# Altium PCB AIL_pcb.PcbDoc
Units mm, origin at the board's own origin, x right, y up, seen from the top; angles counter-clockwise.
Board outline 65 x 35 mm, 2 copper layers (Top Layer, Bottom Layer); 14 components, 9 nets, 36 pads, 2 vias.
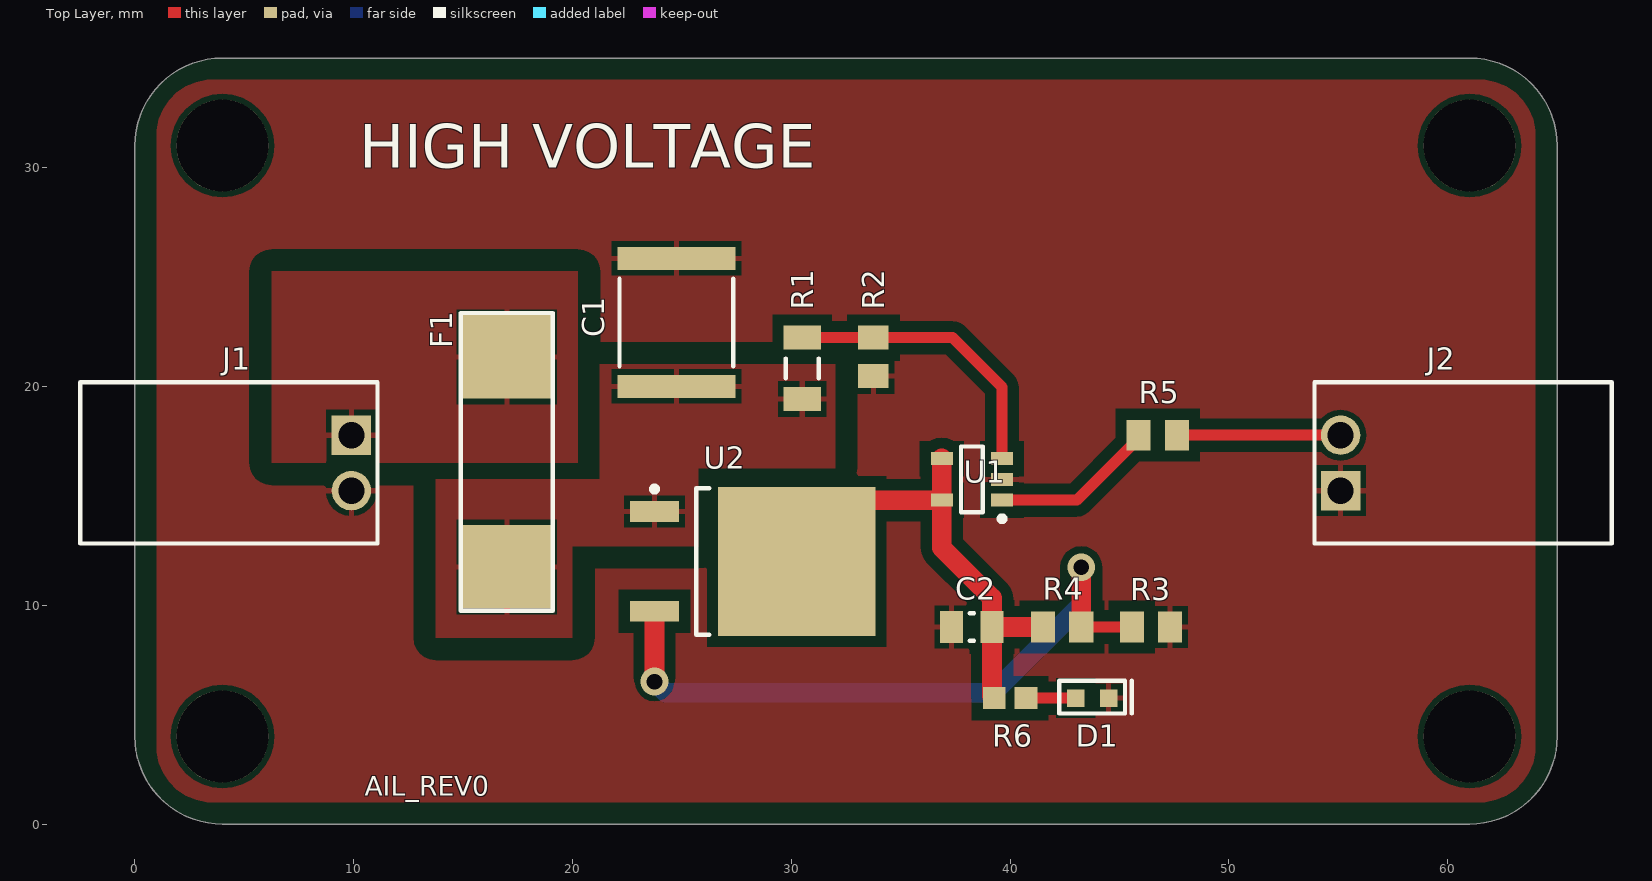
[diagram p0: Top Layer view]
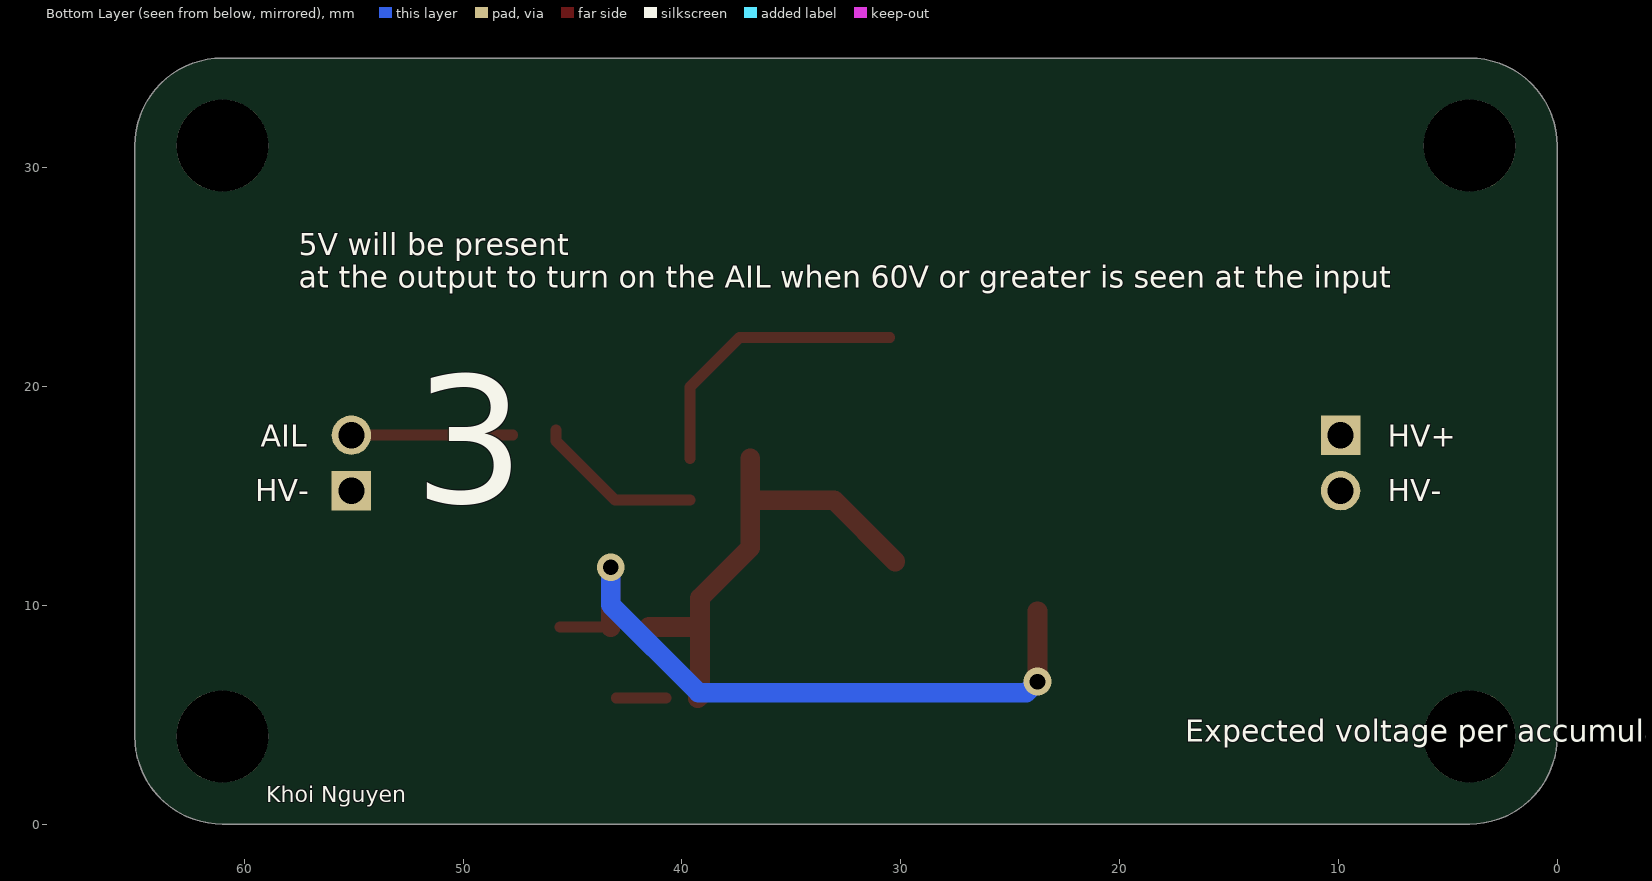
[diagram p1: Bottom Layer view, seen from below]
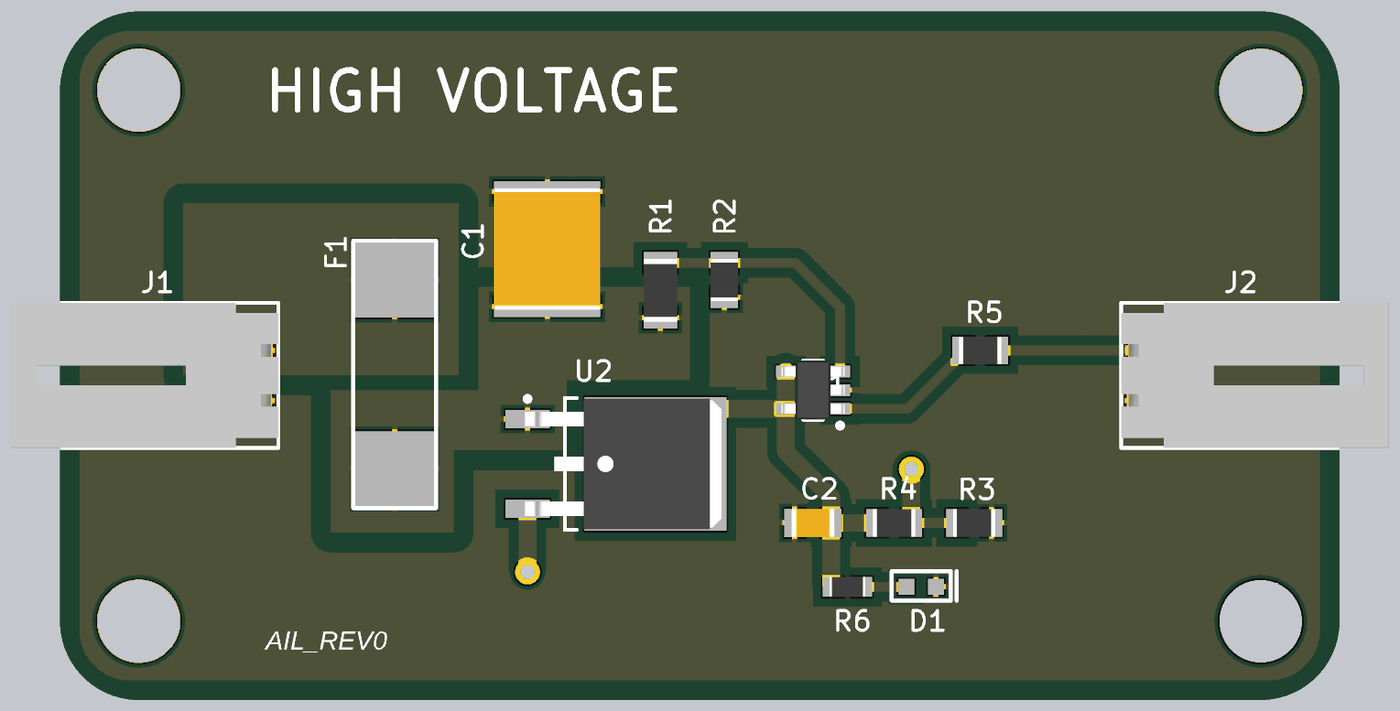
[diagram p2: 3D render of the assembled board from above, using the file's embedded part models]

## Layer stack, top to bottom
Top Solder: solder mask 0.0102, Solder Resist, Dk 3.5
Top Layer: signal copper 0.0356
Dielectric 1: dielectric 0.32, FR-4, Dk 4.8
Bottom Layer: signal copper 0.0356
Bottom Solder: solder mask 0.0102, Solder Resist, Dk 3.5

## Board outline
0,4 0,31 cw(c4,31) 4,35 61,35 cw(c61,31) 65,31 65,4 cw(c61,4) 61,0 4,0 cw(c4,4)

## Design rules (kind name [scope] priority, off if disabled: settings)
Clearance Clearance_3 [InNamedPolygon('Top Layer-HV_GND')] p1: gap=0.254 ignorepadtopadclearanceinfootprint=FALSE except(0: Arc-Hole Track-Hole SMDPad-Hole THPad-Hole Via-Hole Fill-Hole Poly-Hole Region-Hole Text-Hole; 0.5: Track-Poly SMDPad-Poly; 1: Poly-Poly)
Clearance [All] p2: gap=0.254 ignorepadtopadclearanceinfootprint=FALSE except(0: Arc-Hole Track-Hole SMDPad-Hole THPad-Hole Via-Hole Fill-Hole Poly-Hole Region-Hole Text-Hole)
PlaneClearance [InNet('HV_GND')] p1: clearance=5
PolygonConnect [All] p1: connectstyle=Relief reliefconductorwidth=0.254 reliefentries=4 polygonreliefangle="90 Angle" airgapwidth=0.254
RoutingVias [All] p1: holewidth=0.711 width=1.27 viastyle="Through Hole" minholewidth=0.711 minwidth=1.27 maxholewidth=0.711 maxwidth=1.27
SolderMaskExpansion [All] p1: expansion=0.102
Width [All] p1: maxlimit=1 minlimit=0.1 preferedwidth=0.25 minimp=50.000000 maximp=50.000000 favimp=50.000000
29 further rules are at their usual default settings.

## Components (designator, comment, footprint, x,y, rotation, side; value= is the part's Value field where it differs from the comment)
C1 "2.2 uF" CAPC5850X25N 24.75,22.925 r270 top
C2 "1 uF" CAPC2012X14N 38.25,9 r0 top
D1 "Green" LED_0603 43.75,5.75 r0 top
F1 "250V 800mA" FUSE_SMD 17,18.75 r270 top
J1 "HV" 2_PIN_CONNECTOR -2.5,16.5 r270 top
J2 "AIL" 2_PIN_CONNECTOR 67.5,16.5 r90 top
R1 "110k Ohm" RESC3116X06N 30.5,20.825 r270 top
R2 "10k Ohm" RESC2012X06N 33.75,21.35 r270 top
R3 "18.2k Ohm" RESC2012X06N 46.439,9 r180 top
R4 "6.04k Ohm" RESC2012X06N 42.375,9 r180 top
R5 "560 Ohm" RESC2012X06N 46.75,17.77 r180 top
R6 "300 Ohm" RESC1608X06N 40,5.75 r180 top
U1 "MCP6001T-I/OT" SOT95P280X145-5N 38.254,15.75 r180 top
U2 "LDO" DPAK228P998X235-3N 28.25,12 r0 top

## Footprints (in the part's own frame and the unit in brackets; to place one, negate y for a bottom-side part, rotate by r counter-clockwise, add the part's x,y. Pads: shape width x height; smd on the part's side, far side on the other; paste and mask are expansions set on the pad)
2_PIN_CONNECTOR [mm]
  rect 1.8x1.8 hole 1.2: 1(-1.27,12.4)
  round 1.8 hole 1.2: 2(1.27,12.4)
  silkscreen extent -3.68,0 3.68,13.59, body extent -3.68,0 3.68,13.59, height 8.06
CAPC2012X14N [mm] "Chip Capacitor, 2-Leads, Body 2.00x1.25mm, IPC Medium Density"
  rect 1.05x1.45 smd: 1(-0.925,0) 2(0.925,0)
  silkscreen extent -0.1,-0.62 0.1,0.62, body extent -1.1,-0.72 1.1,0.72, height 1.4
CAPC5850X25N [mm] "Chip Capacitor, 2-Leads, Body 5.75x5.00mm, IPC Medium Density"
  rect 1.05x5.4 smd: 1(-2.925,0) 2(2.925,0)
  silkscreen extent -2,-2.6 2,2.6, body extent -3.1,-2.7 3.1,2.7, height 2.5
DPAK228P998X235-3N [mm] "D-PAK, 3-Pads, Body 6.31x6.69mm (max), IPC Medium Density"
  rect 2.25x0.95 smd: 1(-4.5,2.28) 3(-4.5,-2.28)
  rect 7.2x6.8 smd: 4(2,0)
  silkscreen extent -4.62,-3.35 -2,3.43, body extent -4.62,-3.32 5.36,3.32, height 2.45
FUSE_SMD [mm]
  rect 3.81x4.06 smd: 1(-2.6,0) 2(7,0)
  silkscreen extent -4.6,-2.1 9,2.1
LED_0603 [mm]
  rect 0.8x0.8 smd: 1(-0.75,0) 2(0.75,0)
  silkscreen extent -1.5,-0.7 1.8,0.8
RESC1608X06N [mm] "Chip Resistor, 2-Leads, Body 1.60x0.80mm, IPC Medium Density"
  rect 1.05x1 smd: 1(-0.725,0) 2(0.725,0)
  body extent -0.9,-0.5 0.9,0.5, height 0.55
RESC2012X06N [mm] "Chip Resistor, 2-Leads, Body 2.00x1.25mm, IPC Medium Density"
  rect 1.1x1.4 smd: 1(-0.875,0) 2(0.875,0)
  body extent -1.07,-0.7 1.07,0.7, height 0.6
RESC3116X06N [mm] "Chip Resistor, 2-Leads, Body 3.10x1.60mm, IPC Medium Density"
  rect 1.1x1.7 smd: 1(-1.4,0) 2(1.4,0)
  silkscreen extent -0.45,-0.75 0.45,0.75, body extent -1.6,-0.85 1.6,0.85, height 0.65
SOT95P280X145-5N [mm] "SOT23, 5-Leads, Body 2.90x2.80mm, Pitch 0.95mm, IPC Medium Density"
  rect 1x0.6 smd: 1(-1.375,0.95) 2(-1.375,0) 3(-1.375,-0.95) 4(1.375,-0.95) 5(1.375,0.95)
  silkscreen extent -1.5,-1.5 0.5,1.92, body extent -1.6,-1.5 1.6,1.5, height 1.45

## Part data
C1: library part CGA9P3X7T2E225K250KE, "CAP CER 2.2UF 250V X7T 2220", Capacitance=2.2uF, Case/Package=2220, Case Code (Metric)=5750, Dielectric=X7T, Manufacturer=TDK, Max Operating Temperature=125°C, Min Operating Temperature=-55°C, Package Quantity=1, Ratings=AEC-Q200, Supplier Part Number 1=445-8766-1-ND, Tolerance=10%, Voltage Rating=250V, Case Code (Imperial)=2220, ComponentLink1Description=http://www.mouser.com/ds/2/400/lcc_commercial_soft_en-775842.pdf?src-supplier=Mouser, ComponentLink1URL=http://www.mouser.com/ds/2/400/lcc_commercial_soft_en-775842.pdf?src-supplier=Mouser, ComponentLink2Description=http://www.farnell.com/datasheets/1839935.pdf?src-supplier=Element14, ComponentLink2URL=http://www.farnell.com/datasheets/1839935.pdf?src-supplier=Element14, Depth=5mm, Features="Soft Termination", Height=2.5mm, Lead Free="Lead Free", Length=5.7mm, Manufacturer Part Number=CGA9P3X7T2E225K250KE, Mount="Surface Mount", Packaging="Tape and Reel", Pricing 1="1=4.7, 10=4.227, 100=3.1935 (USD)", REACH SVHC="No SVHC", Stock 1=26264, Supplier 1=Digi-Key, Termination=SMD/SMT, Thickness=0.11inch, Voltage Rating (DC)=250V, Weight=0.016932oz, Width=5mm
C2: library part CL10A105KP8NNNC, "Cap Ceramic 1uF 10V X5R 10% SMD 0603 85C Paper T/R", Capacitance=1uF, Case/Package=0603, Case Code (Metric)=1608, Dielectric=X5R, Manufacturer=Samsung, Max Operating Temperature=85°C, Min Operating Temperature=-55°C, Package Quantity=1, Supplier Part Number 1=1276-1182-1-ND, Tolerance=10%, Voltage=10V, Case Code (Imperial)=0603, ComponentLink1Description=https://www.verical.com/server-webapp/html/getDatasheet?partID=358616&src-supplier=Verical, ComponentLink1URL=https://www.verical.com/server-webapp/html/getDatasheet?partID=358616&src-supplier=Verical, ComponentLink2Description=http://www1.futureelectronics.com/doc/SAMSUNG%20PASSIVE/CL05B104KQ5NNNC.pdf?src-supplier=Future+Electronics, ComponentLink2URL=http://www1.futureelectronics.com/doc/SAMSUNG%20PASSIVE/CL05B104KQ5NNNC.pdf?src-supplier=Future+Electronics, Contact Plating=Tin, Depth=0.8mm, Height=0.8mm, Length=1.6mm, Manufacturer Part Number=CL10A105KP8NNNC, Mount="Surface Mount", Packaging="Tape and Reel", Pricing 1="1=0.1, 10=0.036, 100=0.0161, 500=0.01152, 1000=0.00905 (USD)", Radiation Hardening=No, Stock 1=3646234, Supplier 1=Digi-Key, Thickness=0.035inch, Voltage Rating=10V, Width=0.031inch
D1: library part LTST-C191KGKT, "LED Uni-Color Green 574nm 2-Pin Chip LED T/R", Case/Package=0603, Case Code (Metric)=1608, Forward Current=30mA, Forward Voltage=2V, Lens Color=Colorless, Manufacturer="Vishay Lite-On", Max Operating Temperature=85°C, Max Power Dissipation=75mW, Min Operating Temperature=-55°C, Package Quantity=1, Reverse Voltage=5V, Supplier Part Number 1=160-1446-1-ND, Test Current=20mA, Case Code (Imperial)=0603, Color=Green, ComponentLink1Description=http://optoelectronics.liteon.com/upload/download/DS22-2000-228/LTST-C191KGKT.PDF?src-supplier=Digi-Key, ComponentLink1URL=http://optoelectronics.liteon.com/upload/download/DS22-2000-228/LTST-C191KGKT.PDF?src-supplier=Digi-Key, Depth=0.8mm, Dominant Wavelength=571nm, Height=0.55mm, Illumination Color=Green, Lead Free="Lead Free", Length=1.6mm, Lens Style=Rectangular,Colorless, Lens Transparency=Clear, Luminous Intensity=35mcd, Manufacturer Part Number=LTST-C191KGKT, Mount="Surface Mount", Number of Elements=1, Number of LEDs=1, Number of Pins=2, Packaging="Tape and Reel", Power Dissipation=75mW, Power Rating=75mW, Pricing 1="1=0.28, 10=0.201, 100=0.0954, 500=0.06364, 1000=0.04984, 2500=0.04878 (USD)", Radiation Hardening=No, Stock 1=840932, Supplier 1=Digi-Key, Viewing Angle=130°, Wavelength=574nm, Width=0.8mm
F1: library part 0678D0800-02, Case/Package=SMD/SMT, Current Rating=800mA, DC Cold Resistance=380mR, Manufacturer=Bel, Max Operating Temperature=125°C, Min Operating Temperature=-55°C, Supplier Part Number 1=507-2258-6-ND, Voltage Rating (AC)=350V, Voltage Rating (DC)=250V, Approvals=cURus, Fuse Type="Board Mount (Cartridge Style Excluded)", Manufacturer Part Number=0678D0800-02, Mount="Surface Mount", Packaging="Tape and Reel", Pricing 1="1=1.2, 5=1.164, 10=1.089, 50=0.901, 100=0.7508, 250=0.732, 500=0.61936, 1000=0.54429 (USD)", Stock 1=2000, Supplier 1=Digi-Key
J1 J2: library part 0705530001, Color=Black, Contact Resistance=30mR, Manufacturer=Molex, Max Operating Temperature=105°C, Min Operating Temperature=-40°C, Supplier Part Number 1=WM4900-ND, ComponentLink1Description=https://www.molex.com/pdm_docs/ps/PS-70400.pdf?src-supplier=Digi-Key, ComponentLink1URL=https://www.molex.com/pdm_docs/ps/PS-70400.pdf?src-supplier=Digi-Key, ComponentLink2Description=http://www.molex.com/webdocs/datasheets/pdf/en-us/0705530001_PCB_HEADERS.pdf?src-supplier=Avnet, ComponentLink2URL=http://www.molex.com/webdocs/datasheets/pdf/en-us/0705530001_PCB_HEADERS.pdf?src-supplier=Avnet, Connector Type="Male Pin", Contact Material=Bronze, Contact Mating Length=0.24inch, Contact Plating=Gold, Depth=13.59mm, Fastening Type=Latch, Housing Color=Black, Housing Material=Polyester, Length=7.37mm, Manufacturer Part Number=0705530001, Mount="Through Hole", Number of Contacts=2, Number of Positions=2, Number of Rows=1, Orientation="Right Angle", Packaging=Rail/Tube, Pitch=2.54mm, Pricing 1="1=0.71, 72=0.53486, 144=0.51264, 504=0.44575, 1008=0.36775, 5040=0.32318, 10008=0.30089 (USD)", Radiation Hardening=No, Stock 1=14591, Supplier 1=Digi-Key, Termination=Solder
R1: library part RC1206FR-07110KL, "RES SMD 110K OHM 1% 1/4W 1206", Case/Package=1206, Case Code (Metric)=3216, Manufacturer=Yageo, Max Operating Temperature=155°C, Max Power Dissipation=250mW, Min Operating Temperature=-55°C, Package Quantity=1, Resistance=110kR, Supplier Part Number 1=311-110KFRCT-ND, Temperature Coefficient=100ppm/°C, Tolerance=1%, Voltage Rating=200V, Case Code (Imperial)=1206, ComponentLink1Description=http://www.yageo.com.tw/exep/pages/download/literatures/PYu-R_INT-thick_7.pdf?src-supplier=Digi-Key, ComponentLink1URL=http://www.yageo.com.tw/exep/pages/download/literatures/PYu-R_INT-thick_7.pdf?src-supplier=Digi-Key, ComponentLink2Description=http://www.yageo.com/documents/recent/PYu-RC_Group_51_RoHS_L_9.pdf?src-supplier=Digi-Key, ComponentLink2URL=http://www.yageo.com/documents/recent/PYu-RC_Group_51_RoHS_L_9.pdf?src-supplier=Digi-Key, ComponentLink3Description=http://documents.rs-components.com/techlib://itc_doclist_GB.htm?stockno=6182344&src-supplier=RSComponents, ComponentLink3URL=http://documents.rs-components.com/techlib://itc_doclist_GB.htm?stockno=6182344&src-supplier=RSComponents, ComponentLink4Description=http://www.yageo.com/documents/recent/PYu-RC1206_51_RoHS_L-4.pdf?src-supplier=Future+Electronics, ComponentLink4URL=http://www.yageo.com/documents/recent/PYu-RC1206_51_RoHS_L-4.pdf?src-supplier=Future+Electronics, Composition="Thick Film", Depth=1.6mm, Features="Moisture Resistant", Height=0.55mm, Lead Free="Lead Free", Length=3.1mm, Manufacturer Part Number=RC1206FR-07110KL, Military Standard=Not, Mount="Surface Mount", Number of Terminations=2, Packaging="Tape and Reel", Power Rating=250mW, Pricing 1="1=0.1, 10=0.071, 100=0.0291, 1000=0.01306, 2500=0.01134 (USD)", Stock 1=78364, Supplier 1=Digi-Key, Termination=SMD/SMT, Voltage Rating (DC)=200V, Width=0.063inch
R2: library part RNCP0805FTD10K0, "RES 10K OHM 1% 1/4W 0805", Case/Package=0805, Case Code (Metric)=2012, Manufacturer="Stackpole Electronics", Max Operating Temperature=155°C, Max Power Dissipation=250mW, Min Operating Temperature=-55°C, Resistance=10kR, Supplier Part Number 1=RNCP0805FTD10K0CT-ND, Temperature Coefficient=100ppm/°C, Tolerance=1%, Case Code (Imperial)=0805, ComponentLink1Description=https://www.seielect.com/catalog/SEI-Packaging.pdf?src-supplier=Digi-Key, ComponentLink1URL=https://www.seielect.com/catalog/SEI-Packaging.pdf?src-supplier=Digi-Key, Composition="Thin Film", Features="Moisture Resistant,Anti-Sulfur", Height=0.024inch, Lead Free="Lead Free", Length=0.079inch, Manufacturer Part Number=RNCP0805FTD10K0, Mount="Surface Mount", Number of Terminations=2, Packaging="Tape and Reel", Pricing 1="1=0.1, 10=0.072, 100=0.0277, 1000=0.0122, 2500=0.01053 (USD)", Stock 1=152624, Supplier 1=Digi-Key, Width=0.049inch
R3: library part ERA-6AEB1822V, "Panasonic ERA Series Thin Film Surface Mount Resistor 0805 Case 18.2k 0.1% 0.125W 25ppm/C", Case/Package=0805, Case Code (Metric)=2012, Manufacturer=Panasonic, Max Operating Temperature=155°C, Max Power Dissipation=125mW, Min Operating Temperature=-55°C, Package Quantity=5000, Resistance=18.2kR, Supplier Part Number 1=P18.2KDACT-ND, Temperature Coefficient=25ppm/°C, Tolerance=0.1%, Voltage Rating=100V, Case Code (Imperial)=0805, ComponentLink1Description=http://www.farnell.com/datasheets/485442.pdf?src-supplier=Farnell, ComponentLink1URL=http://www.farnell.com/datasheets/485442.pdf?src-supplier=Farnell, ComponentLink2Description=http://www.mouser.com/ds/2/315/AOA0000C237-1100991.pdf?src-supplier=Mouser, ComponentLink2URL=http://www.mouser.com/ds/2/315/AOA0000C237-1100991.pdf?src-supplier=Mouser, ComponentLink3Description=http://www.farnell.com/datasheets/485442.pdf?src-supplier=Element14, ComponentLink3URL=http://www.farnell.com/datasheets/485442.pdf?src-supplier=Element14, ComponentLink4Description=http://uk.rs-online.com/webdocs/0eb1/0900766b80eb1d8c.pdf?src-supplier=RSComponents, ComponentLink4URL=http://uk.rs-online.com/webdocs/0eb1/0900766b80eb1d8c.pdf?src-supplier=RSComponents, ComponentLink5Description=https://produktinfo.conrad.com/datenblaetter/450000-474999/458878-da-01-en-WIDERSTAND_0805_ERA.pdf?src-supplier=Conrad, ComponentLink5URL=https://produktinfo.conrad.com/datenblaetter/450000-474999/458878-da-01-en-WIDERSTAND_0805_ERA.pdf?src-supplier=Conrad, Composition="Metal Film,Thin Film", Contact Plating=Tin, Depth=1.25mm, Features="Automotive AEC-Q200", Height=0.5mm, Lead Free="Lead Free", Length=2mm, Manufacturer Part Number=ERA-6AEB1822V, Military Standard=Not, Mount="Surface Mount", Number of Pins=2, Number of Terminations=2, Packaging="Tape and Reel", Power Rating=125mW, Pricing 1="1=0.36, 10=0.302, 100=0.1182, 1000=0.04948, 2500=0.04536 (USD)", Radiation Hardening=No, REACH SVHC="No SVHC", Stock 1=8429, Supplier 1=Digi-Key, Termination=Solder, Voltage Rating (DC)=100V, Width=1.25mm
R4: library part RR1220P-6041-D-M, "RES SMD 6.04KOHM 0.5% 1/10W 0805", Case/Package=0805, Case Code (Metric)=2012, Manufacturer=Susumu, Max Operating Temperature=125°C, Min Operating Temperature=-55°C, Power Rating=100mW, Resistance=6.04kR, Supplier Part Number 1=RR12P6.04KDCT-ND, Temperature Coefficient=25ppm/°C, Tolerance=0.5%, Voltage Rating=100V, Case Code (Imperial)=0805, Composition="Thin Film", Height=0.4mm, Lead Free="Lead Free", Length=2mm, Manufacturer Part Number=RR1220P-6041-D-M, Number of Pins=2, Packaging="Tape and Reel", Pricing 1="1=0.11, 10=0.098, 100=0.0376, 1000=0.01654, 2500=0.01428 (USD)", REACH SVHC="No SVHC", Stock 1=40354, Supplier 1=Digi-Key, Termination=SMD/SMT, Voltage Rating (DC)=100V, Width=1.25mm
R5: library part ESR10EZPJ561, "RES SMD 560 OHM 5% 0.4W 0805", Case/Package=0805, Case Code (Metric)=2012, Manufacturer=Rohm, Max Operating Temperature=155°C, Max Power Dissipation=400mW, Min Operating Temperature=-55°C, Package Quantity=1, Power Rating=250mW, Resistance=560R, Supplier Part Number 1=RHM560KDKR-ND, Temperature Coefficient=200ppm/°C, Tolerance=5%, Case Code (Imperial)=0805, ComponentLink1Description=http://www.rohm.com/web/global/datasheet/ESR01MZPF/esr-e?src-supplier=Digi-Key, ComponentLink1URL=http://www.rohm.com/web/global/datasheet/ESR01MZPF/esr-e?src-supplier=Digi-Key, ComponentLink2Description=https://www.rohm.com/datasheet/ESR01MZPF/esr-e?src-supplier=Digi-Key, ComponentLink2URL=https://www.rohm.com/datasheet/ESR01MZPF/esr-e?src-supplier=Digi-Key, ComponentLink3Description=http://www1.futureelectronics.com/doc/ROHM%20SEMICONDUCTOR/ESR10EZPD.pdf?src-supplier=Future+Electronics, ComponentLink3URL=http://www1.futureelectronics.com/doc/ROHM%20SEMICONDUCTOR/ESR10EZPD.pdf?src-supplier=Future+Electronics, Composition="Thick Film", Features="Automotive AEC-Q200", Height=0.026inch, Lead Free="Lead Free", Length=0.079inch, Manufacturer Part Number=ESR10EZPJ561, Number of Terminations=2, Packaging="Tape and Reel", Pricing 1="1=0.1, 10=0.083, 100=0.0318, 1000=0.01398, 2500=0.01207 (USD)", Stock 1=10361, Supplier 1=Digi-Key, Width=0.049inch
R6: library part RR0816P-301-D, "RES SMD 300 OHM 0.5% 1/16W 0603", Case/Package=0603, Case Code (Metric)=1608, Manufacturer=Susumu, Max Operating Temperature=125°C, Max Power Dissipation=63mW, Min Operating Temperature=-55°C, Package Quantity=5000, Resistance=300R, Supplier Part Number 1=RR08P300DCT-ND, Temperature Coefficient=25ppm/°C, Tolerance=0.5%, Voltage Rating=75V, Case Code (Imperial)=0603, ComponentLink1Description=http://www.susumu.co.jp/common/pdf/n_catalog_partition05_en.pdf?src-supplier=Digi-Key, ComponentLink1URL=http://www.susumu.co.jp/common/pdf/n_catalog_partition05_en.pdf?src-supplier=Digi-Key, Composition="Thin Film", Depth=0.8mm, Height=0.4mm, Lead Free="Lead Free", Length=1.6mm, Manufacturer Part Number=RR0816P-301-D, Number of Pins=2, Number of Terminations=2, Packaging="Tape and Reel", Power Rating=63mW, Pricing 1="1=0.11, 10=0.098, 100=0.0376, 1000=0.01654, 2500=0.01428 (USD)", REACH SVHC=Unknown, Stock 1=26864, Supplier 1=Digi-Key, Termination=SMD/SMT, Voltage Rating (DC)=75V, Width=0.8mm
U1: "MICROCHIP - MCP6001T-I/OT - OP AMP, 1MHZ, 0.6V/uS, SOT-23-5, FULL REEL", Case/Package=SOT-23, Input Bias Current=1pA, Input Offset Voltage (Vos)=4.5mV, Manufacturer=Microchip, Max Operating Temperature=85°C, Max Supply Voltage=6V, Min Operating Temperature=-40°C, Min Supply Voltage=1.8V, Nominal Supply Current=100uA, Operating Supply Voltage=5.5V, Output Current=23mA, Package Quantity=1, Power Supply Rejection Ratio (PSRR)=86dB, Supplier Part Number 1=MCP6001T-I/OTCT-ND, Voltage Gain=112dB, Bandwidth=1MHz, Common Mode Rejection Ratio=60dB, ComponentLink1Description=http://www.microchip.com/mymicrochip/filehandler.aspx?ddocname=en011705&src-supplier=Digi-Key, ComponentLink1URL=http://www.microchip.com/mymicrochip/filehandler.aspx?ddocname=en011705&src-supplier=Digi-Key, ComponentLink2Description=http://www.microchip.com/mymicrochip/filehandler.aspx?ddocname=en011705&src-supplier=Future+Electronics, ComponentLink2URL=http://www.microchip.com/mymicrochip/filehandler.aspx?ddocname=en011705&src-supplier=Future+Electronics, ComponentLink3Description=http://ww1.microchip.com/downloads/jp/DeviceDoc/jp011705.pdf?src-supplier=Avnet+Europe, ComponentLink3URL=http://ww1.microchip.com/downloads/jp/DeviceDoc/jp011705.pdf?src-supplier=Avnet+Europe, ComponentLink4Description=http://www.farnell.com/datasheets/524878.pdf?src-supplier=Element14, ComponentLink4URL=http://www.farnell.com/datasheets/524878.pdf?src-supplier=Element14, ComponentLink5Description=https://www.alliedelec.com/m/d/c27bf9404cef821af6de3a00b37c1e53.pdf?src-supplier=Allied+Electronics, ComponentLink5URL=https://www.alliedelec.com/m/d/c27bf9404cef821af6de3a00b37c1e53.pdf?src-supplier=Allied+Electronics, ComponentLink6Description=https://www.distrelec.biz/Web/Downloads/_t/ds/mcp6001_2_4_eng_tds.pdf?mime=application%2Fpdf&src-supplier=Distrelec, ComponentLink6URL=https://www.distrelec.biz/Web/Downloads/_t/ds/mcp6001_2_4_eng_tds.pdf?mime=application%2Fpdf&src-supplier=Distrelec, ComponentLink7Description=http://www.produktinfo.conrad.com/datenblaetter/650000-674999/651487-da-01-en-IC_OPAMP_MCP6001T_I_OT_SOT_23_5_MCP.pdf?src-supplier=Conrad, ComponentLink7URL=http://www.produktinfo.conrad.com/datenblaetter/650000-674999/651487-da-01-en-IC_OPAMP_MCP6001T_I_OT_SOT_23_5_MCP.pdf?src-supplier=Conrad, Contact Plating=Tin,Matte, Gain Bandwidth Product=1MHz, Height=1.3mm, Lead Free="Lead Free", Length=3.1mm, Manufacturer Part Number=MCP6001T-I/OT, Mount="Surface Mount", Number of Amplifiers=1, Number of Channels=1, Number of Circuits=1, Number of Elements=1, Number of Pins=5, Operating Supply Current=100uA, Output Current per Channel=23mA, Packaging="Tape and Reel", Pricing 1="1=0.24, 25=0.2, 100=0.18 (USD)", Radiation Hardening=No, REACH SVHC="No SVHC", Slew Rate=0.6V/µs, Stock 1=10725, Supplier 1=Digi-Key, Unity Gain Bandwidth Product=1MHz, Voltage=6V, Width=1.8mm
U2: library part LR8K4-G, "Standard Regulator Pos 1.2V to 440V 0.01A 3-Pin(2+Tab) TO-252", Case/Package=TO-252-3, Dropout Voltage=450mV, Manufacturer=Microchip, Max Input Voltage=450V, Max Operating Temperature=85°C, Max Output Current=10mA, Max Output Voltage=440V, Max Power Dissipation=2.5W, Min Current Limit=30mA, Min Input Voltage=13.2V, Min Operating Temperature=-40°C, Min Output Voltage=1.2V, Output Current=20mA, Package Quantity=2000, Power Supply Rejection Ratio (PSRR)=60dB, Supplier Part Number 1=LR8K4-GCT-ND, Accuracy=5%, ComponentLink1Description=http://www.farnell.com/datasheets/1849628.pdf?src-supplier=Element14, ComponentLink1URL=http://www.farnell.com/datasheets/1849628.pdf?src-supplier=Element14, Contact Plating=Tin,Matte, Height=2.39mm, Lead Free="Lead Free", Length=6.73mm, Manufacturer Part Number=LR8K4-G, Mount="Surface Mount", Number of Outputs=1, Number of Pins=3, Number of Regulators=1, Output Type=Adjustable, Output Voltage=440V, Packaging="Cut Tape", Polarity=Positive, Pricing 1="1=0.93, 25=0.78, 100=0.71 (USD)", Radiation Hardening=No, REACH SVHC="No SVHC", Stock 1=11899, Supplier 1=Digi-Key, Width=6.1mm

## Free pads (board coordinates)
  round 4.2 hole 4.2 unplated: 2(61,4)
  round 4.2 hole 4.2: 3(4,4) 3(4,31) 3(61,31)

## Via types
v1: diameter 1.27, hole 0.711, Top Layer to Bottom Layer, 2 vias

## Nets (pads, with @x,y where several pads share a name; then routed paths per layer and width w, separated by ;. In a path a pad name is that pad's centre, name@x,y a point inside that pad or via, vN(x,y) a via of type N, cw(c..) or ccw(c..) an arc to the next point about the centre after c; other vN are vias at no path point)
5V_TS: C2.2 R4.2 R6.2 U1.4 U1.5 U2.4 | length 21.9
  Top Layer w0.9: U2.4 33.05,14.8 U1.5 ; U1.4 U1.5 ; R6.2 39.175,5.85 C2.2 39.175,10.325 36.879,12.621 U1.5 ; C2.2@39.354,9.071 39.425,9 R4.2
AIL1: J2.2 R5.1 | length 7.4
  Top Layer w0.5: R5.1@47.73,17.77 J2.2
HV+: F1.1 J1.1
HV_GND: C1.1 C2.1 D1.2 J1.2 J2.1 R2.2 R3.1 U1.2
HV_IN: R1.1 R2.1 U1.3 | length 13.3
  Top Layer w0.5: R1.1 R2.1 37.375,22.225 39.629,19.971 U1.3
NetD1_1: D1.1 R6.1 | length 2.3
  Top Layer w0.5: R6.1 D1.1
"REF ADJ": R3.2 R4.1 U2.3 | length 31.1
  Top Layer w0.5: R4.1 R3.2
  Top Layer w0.9: v1@23.75,6.75 U2.3 ; R4.1 v1(43.25,11.734)
  Bottom Layer w0.9: v1(23.75,6.506) 24.256,6 39.237,6 43.25,10.013 v1(43.25,11.734)
Signal: R5.2 U1.1 | length 7.7
  Top Layer w0.5: U1.1 43.05,14.8 45.75,17.5 R5.2@45.75,18
TS: C1.2 F1.2 R1.2 U2.1

## Polygon pours and split planes (outlines as drawn)
HV_GND on Top Layer "Top Layer-HV_GND" (solid, pour order 12): 1,31.46 cw(c3.54,31.46) 3.54,34 61.46,34 cw(c61.46,31.46) 64,31.46 64,3.54 cw(c61.46,3.54) 61.46,1 3.54,1 cw(c3.54,3.54) 1,3.54
TS on Top Layer "Top Layer-TS" (solid, pour order 8): 13.75,15.75 13.75,8.5 20,8.5 20,12.693 25.75,12.693 25.75,16.25 32,16.25 32,21 21.25,21 21.25,15.75
HV+ on Top Layer "Top Layer-HV+" (solid, pour order 6): 6.25,16.5 20.25,16.5 20.25,25.25 6.25,25.25

## Silkscreen, mask and mechanical layers (free items; w line width, h text height)
Top Overlay:
  text "HIGH VOLTAGE" at 10.25,30 h2
  text "AIL_REV0" at 10.5,1 h1.5
Bottom Overlay:
  text "5V will be present / at the output to turn on the AIL when 60V or greater is seen at the input" at 57.5,24.5 h1
  text "HV+" at 7.75,17.25 h1
  text "AIL" at 59.25,17.25 h1
  text "HV-" at 7.75,14.75 h1
  text "HV-" at 59.5,14.75 h1
  text "3" at 52.25,12.75 h10
  text "Expected voltage per accumulator: 64-84V" at 17,3.75 h1
  text "Khoi Nguyen" at 59,0.75 h1.25
Mechanical 13:
  the board outline again, w0.2

## Dimensions
0,0 to 0,35 on Top Overlay
0,-0.127 to 65,0.25 on Top Overlay